# Altium PCB mq-x.PcbDoc
Units mm, origin at the board's own origin, x right, y up, seen from the top; angles counter-clockwise.
Board outline 40.88 x 23.94 mm, 2 copper layers (Top Layer, Bottom Layer); 10 components, 5 nets, 21 pads, 48 vias.
Unrouted connection lines stored in the file: 12.
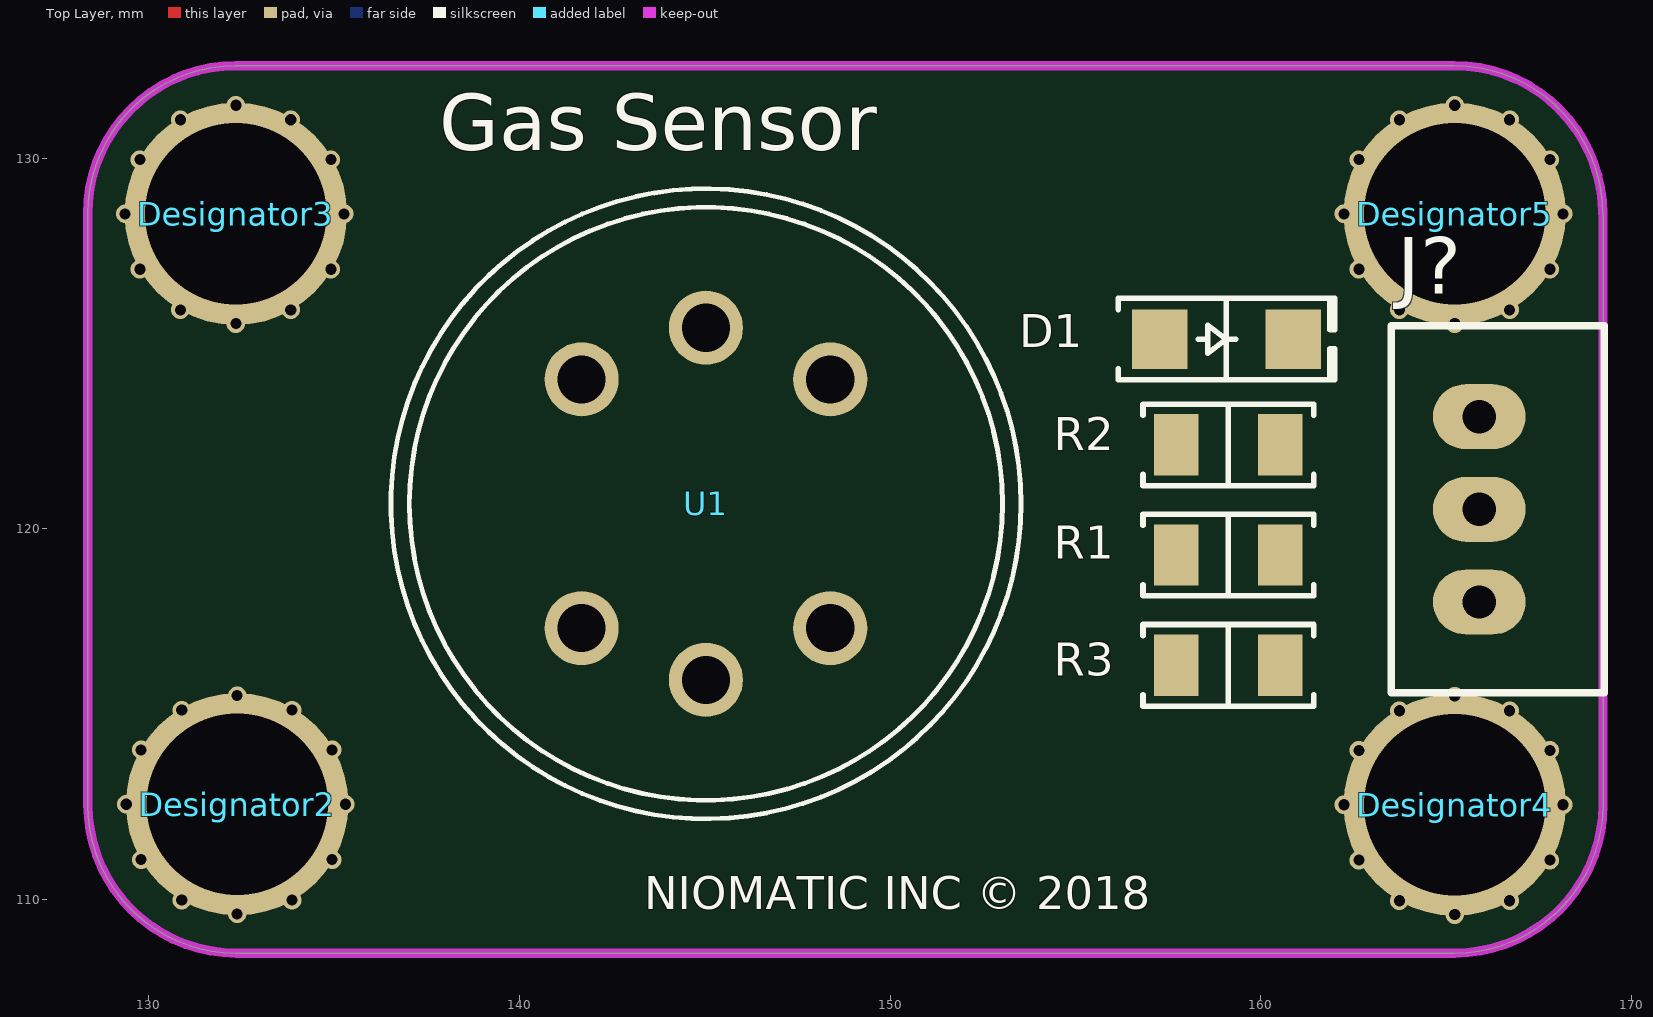
[diagram p0: Top Layer view]
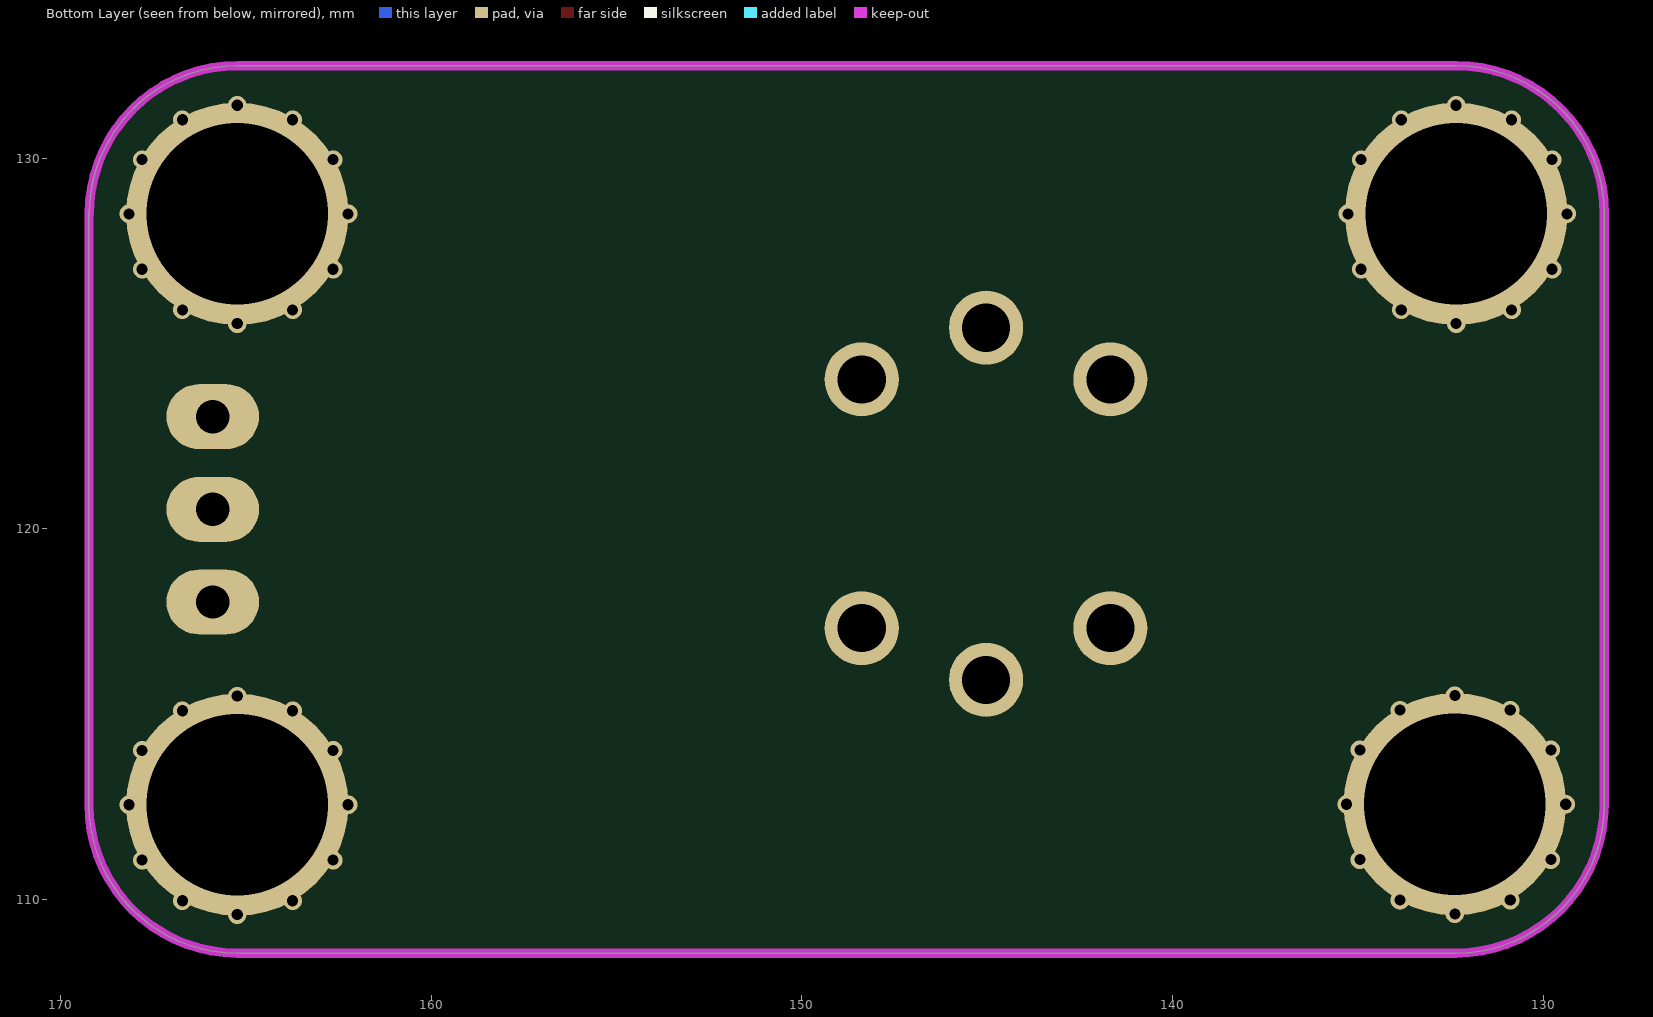
[diagram p1: Bottom Layer view, seen from below]

## Layer stack, top to bottom
Top Solder: solder mask 0.0102, Solder Resist, Dk 3.5
Top Layer: signal copper 0.0356
Dielectric 1: dielectric 0.32, FR-4, Dk 4.8
Bottom Layer: signal copper 0.0356
Bottom Solder: solder mask 0.0102, Solder Resist, Dk 3.5

## Board outline
128.35,112.56 128.35,128.5 cw(c132.35,128.5) 132.35,132.5 165.22,132.5 cw(c165.22,128.5) 169.22,128.5 169.229,128.5 169.229,112.56 cw(c165.229,112.56) 165.229,108.56 132.359,108.56 cw(c132.359,112.56)

## Design rules (kind name [scope] priority, off if disabled: settings)
Clearance [All] p1: gap=0.254 ignorepadtopadclearanceinfootprint=FALSE except(0: Arc-Hole Track-Hole SMDPad-Hole THPad-Hole Via-Hole Fill-Hole Poly-Hole Region-Hole Text-Hole)
PolygonConnect [All] p1: connectstyle=Relief reliefconductorwidth=0.254 reliefentries=4 polygonreliefangle="90 Angle" airgapwidth=0.254
RoomDefinition mq-x [InComponentClass('mq-x')] p1: confinementstyle=ConfineIn formatcopy=TRUE lockcomponents=FALSE outline 178.943,26.924 198.247,26.924 198.247,44.577 178.943,44.577
RoutingVias [All] p1: holewidth=0.711 width=1.27 viastyle="Through Hole" minholewidth=0.711 minwidth=1.27 maxholewidth=0.711 maxwidth=1.27
SolderMaskExpansion [All] p1: expansion=0.102
Width [All] p1: maxlimit=0.254 minlimit=0.254 preferedwidth=0.254
30 further rules are at their usual default settings.

## Classes and differential pairs
component class mq-x: D1 J? R1 R2 R3 U1

## Components (designator, comment, footprint, x,y, rotation, side; value= is the part's Value field where it differs from the comment)
D1 "Green" "LED 1206/3216 RED" 159.07,125.12 r0 top
Designator2 "Comment" "Lego Hole" 132.383,112.575 r0 top locked
Designator3 "Comment" "Lego Hole" 132.349,128.5 r0 top locked
Designator4 "Comment" "Lego Hole" 165.23,112.56 r0 top locked
Designator5 "Comment" "Lego Hole" 165.23,128.5 r0 top locked
J? "Header" "JST XH B3B-XH-A - RIGHT" 165.892,120.53 r90 top
R1 "1K" "RES 1206/3216" 159.12,119.297 r0 top
R2 "4.7K" "RES 1206/3216" 159.12,122.27 r0 top value=1K
R3 "5.1R" "RES 1206/3216" 159.12,116.323 r0 top value=1K
U1 "MQ-X" MQ-X 145.03,120.68 r0 top

## Footprints (in the part's own frame and the unit in brackets; to place one, negate y for a bottom-side part, rotate by r counter-clockwise, add the part's x,y. Pads: shape width x height; smd on the part's side, far side on the other; paste and mask are expansions set on the pad)
"JST XH B3B-XH-A - RIGHT" [mm]
  oval 1.75x2.5 hole 0.9: 1(-2.5,0) 2(0,0) 3(2.5,0)
  silkscreen extent -4.95,-3.38 4.95,2.38, body extent -4.9,-9.15 5,2.35, height 6.1
"LED 1206/3216 RED" [mm] "Chip Diode, 2-Leads, Body 3.13x1.55mm, IPC Medium Density"
  rect 1.5x1.6 smd: 1(-1.8,0) 2(1.8,0)
  silkscreen extent -2.92,-1.1 2.92,1.1, body extent -1.6,-0.8 1.6,0.8, height 0.9
"Lego Hole" [mm]
  round 6 hole 4.9: 0(0,0)
MQ-X [mm]
  round 2 hole 1.3: 1(-3.355,3.355) 2(-3.355,-3.355) 3(3.355,3.355) 4(3.355,-3.355) 5(0,4.75) 6(0,-4.75)
  silkscreen extent -8.5,-8.5 8.5,8.5, body extent -9.5,-9.5 9.5,9.5, height 16.06
"RES 1206/3216" [mm] "Chip Resistor, 2-Leads, Body 3.13x1.55mm, IPC Medium Density"
  rect 1.2x1.65 smd: 1(-1.4,0) 2(1.4,0)
  silkscreen extent -2.3,-1.1 2.3,1.1, body extent -1.57,-0.8 1.62,0.8, height 0.6

## Part data
D1: library part LED, "Chip LED"
J?: library part "3 Pin"
R1 R2 R3: library part Resistor, "SMT Resistor"
U1: Package=None, Availability=Unavailable, MF=Mac8, MP=MQ9, Price=None

## Via types
v1: diameter 0.5, hole 0.3, Top Layer to Bottom Layer, 48 vias

## Nets (pads, with @x,y where several pads share a name; then routed paths per layer and width w, separated by ;. In a path a pad name is that pad's centre, name@x,y a point inside that pad or via, vN(x,y) a via of type N, cw(c..) or ccw(c..) an arc to the next point about the centre after c; other vN are vias at no path point)
Data: J?.3 R2.1 U1.2 U1.4
GND: D1.2 J?.1 R2.2 R3.2
NetD1_1: D1.1 R1.1
NetR3_1: R3.1 U1.6
VCC: J?.2 R1.2 U1.1 U1.3 U1.5
pads on no net: Designator2.0 Designator3.0 Designator4.0 Designator5.0
copper on no net:
  other v1: 165.23,109.6 132.383,109.615 130.889,109.986 133.864,109.986 163.736,109.971 166.711,109.971 129.794,111.081 134.947,111.081 162.641,111.065 167.794,111.065 162.241,112.56 168.151,112.56 129.394,112.575 135.304,112.575 162.641,114.026 167.794,114.026 129.794,114.041 134.947,114.041 163.736,115.098 166.711,115.098 130.889,115.113 133.864,115.113 132.383,115.505 165.23,115.49 132.349,125.54 165.23,125.54 130.855,125.911 133.83,125.911 163.736,125.911 166.711,125.911 129.76,127.005 134.913,127.005 162.641,127.005 167.794,127.005 129.36,128.5 135.27,128.5 162.241,128.5 168.151,128.5 129.76,129.966 134.913,129.966 162.641,129.966 167.794,129.966 130.855,131.038 133.83,131.038 163.736,131.038 166.711,131.038 132.349,131.43 165.23,131.43

## Keep-outs
Keep-Out Layer:
  lines w0.254: 128.35,112.56 128.35,128.5 cw(c132.35,128.5) 132.35,132.5 165.22,132.5 cw(c165.22,128.5) 169.22,128.5 ; 128.359,112.56 ccw(c132.359,112.56) 132.359,108.56 165.229,108.56 ccw(c165.229,112.56) 169.229,112.56 169.229,128.5

## Silkscreen, mask and mechanical layers (free items; w line width, h text height)
Top Overlay:
  text "Gas Sensor" at 137.83,130.22 h1.52
  text "NIOMATIC INC © 2018" at 143.36,109.449 h1.52
Top Solder:
  drawing of 381 lines, arcs and shapes, not listed
  text "NIOT Kit" at 150.373,110.99 h2